# Altium PCB Mobile Tracker Hat.PcbDoc
Units mm, origin at the board's own origin, x right, y up, seen from the top; angles counter-clockwise.
Board outline 75 x 68 mm, 2 copper layers (Top Layer, Bottom Layer), stack 1.569 mm thick; 37 components, 17 nets, 90 pads, 85 vias.
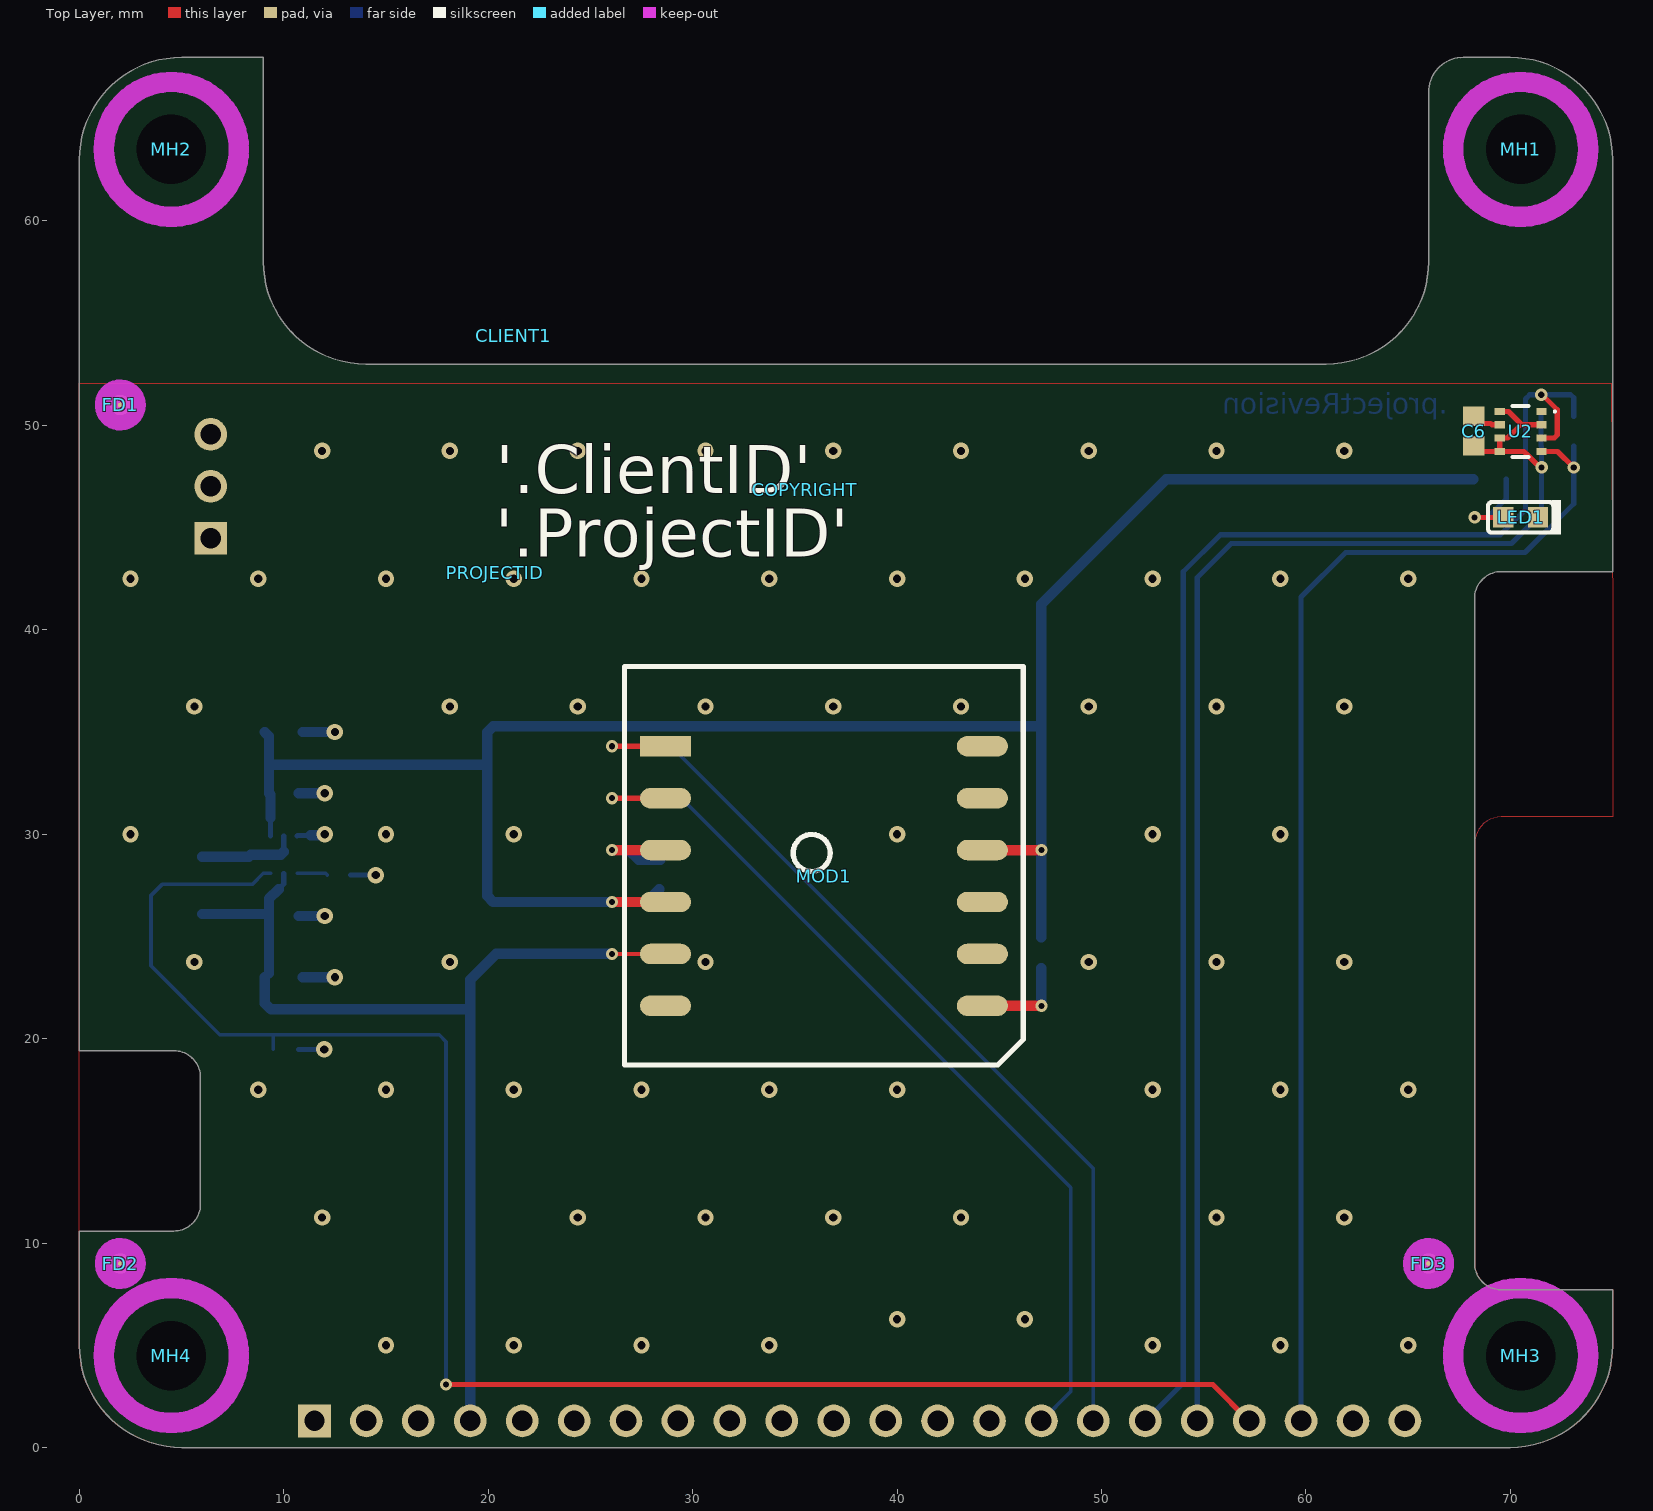
[diagram p0: Top Layer view]
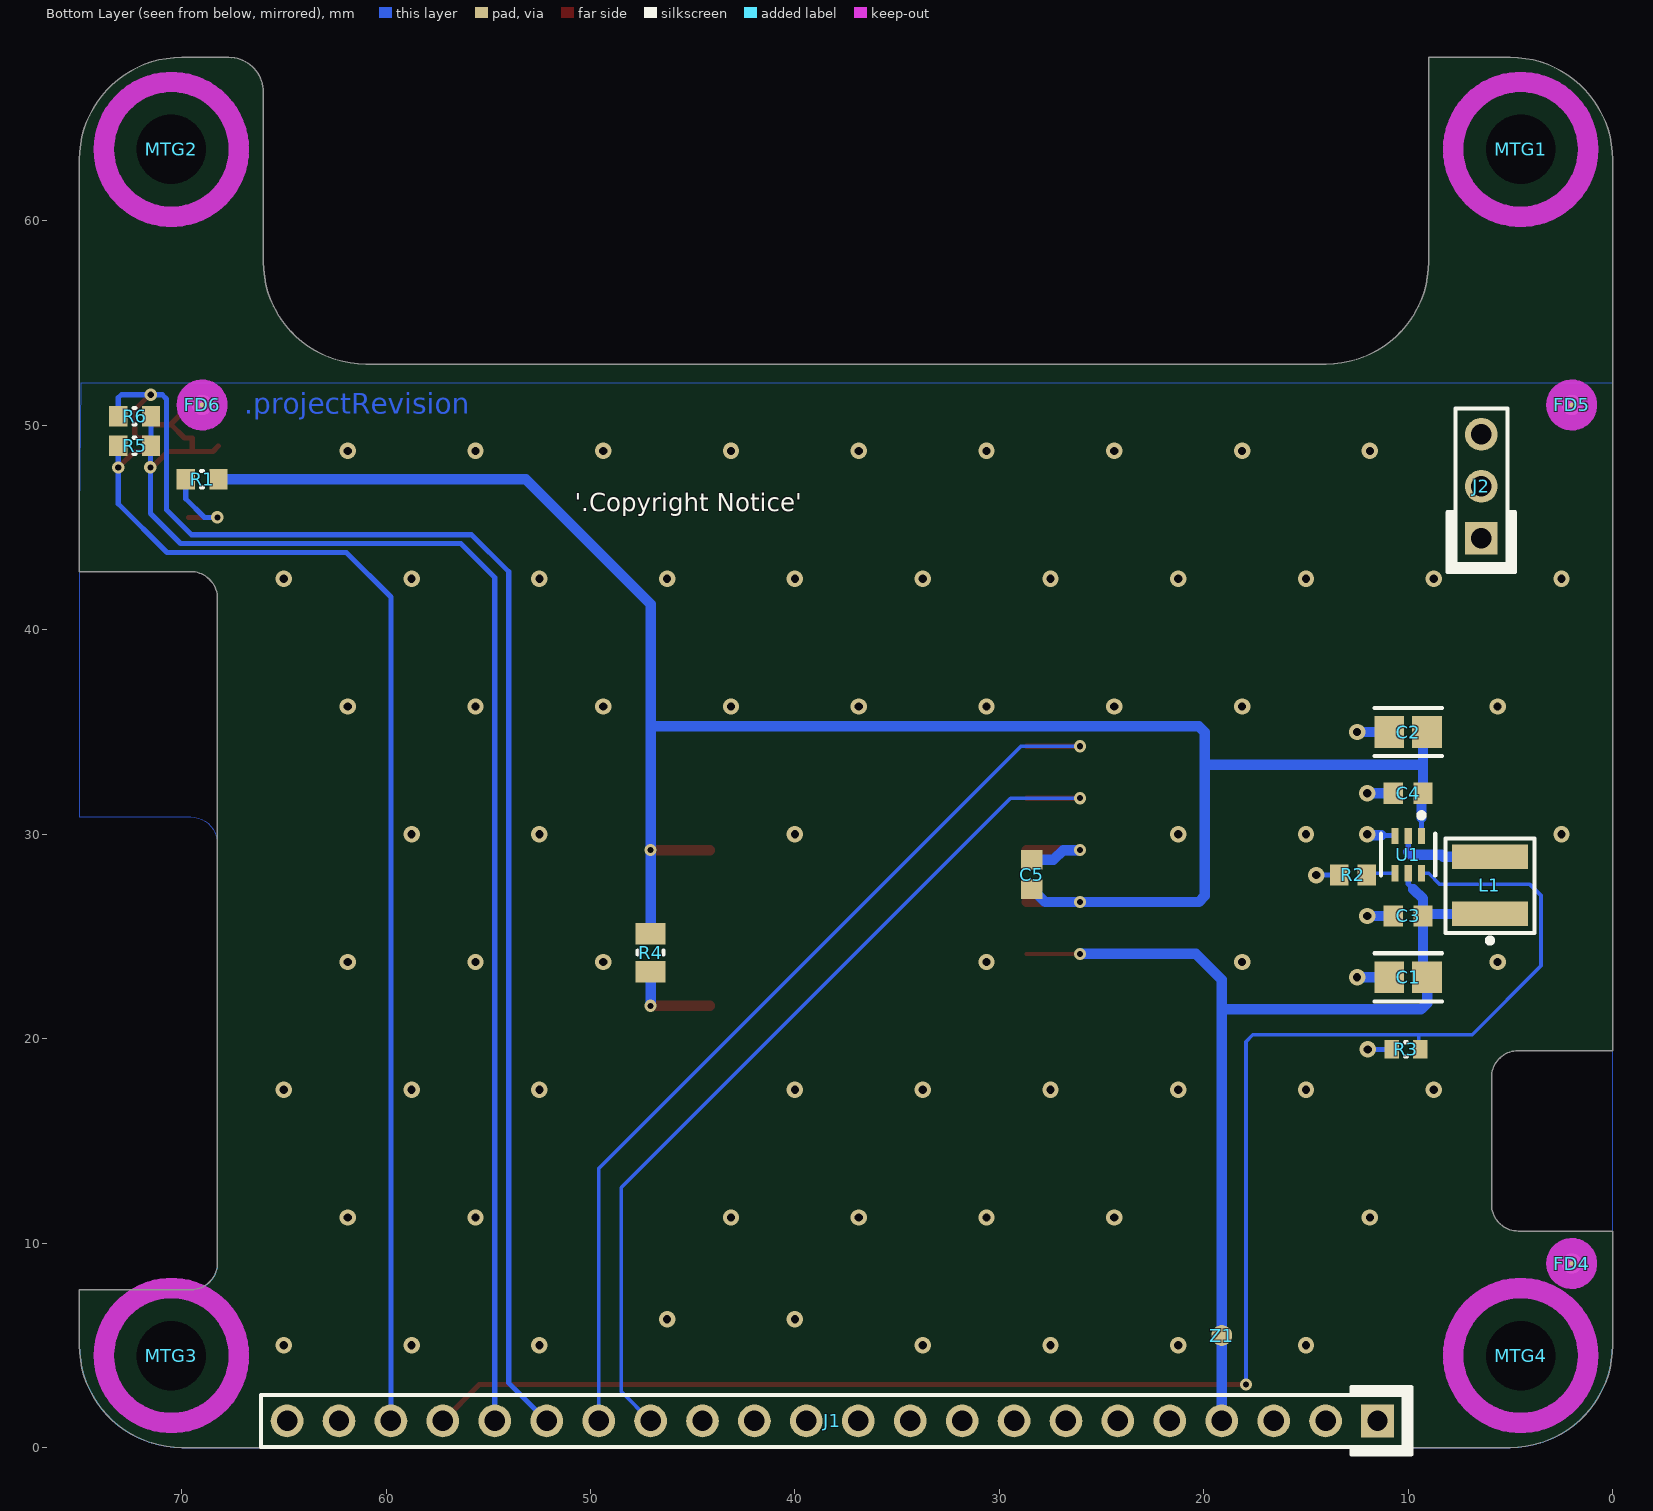
[diagram p1: Bottom Layer view, seen from below]

## Layer stack, top to bottom
Top Solder: solder mask 0.0254, SM-001, Dk 4
Top Layer: signal copper 0.035
Dielectric 1: core 1.4986, Core-043, Dk 4.3
Bottom Layer: signal copper 0.035
Bottom Solder: solder mask 0.0254, SM-001, Dk 4

## Board outline
5,0 cw(c5,5) 0,5 0,10.591 4.62,10.591 ccw(c4.62,11.891) 5.92,11.891 5.92,18.112 ccw(c4.62,18.112) 4.62,19.412 0,19.412 0,63 cw(c5,63) 5,68 9,68 9,58 ccw(c14,58) 14,53 61,53 ccw(c61,58) 66,58 66,66.309 cw(c67.691,66.309) 67.691,68 70,68 cw(c70,63) 75,63 75,42.846 69.55,42.846 ccw(c69.55,41.546) 68.25,41.546 68.25,9.018 ccw(c69.55,9.018) 69.55,7.718 75,7.718 75,5 cw(c70,5) 70,0

## Design rules (kind name [scope] priority, off if disabled: settings)
AcuteAngle [All] p0: scope1count=1 scope1_0_kind=Board scope1_0_value=Board scope2count=1 scope2_0_kind=Board scope2_0_value=Board commentlength=0 minimum=6.00000000000000E+0001
AcuteAngle [All] p1: minimum=6.00000000000000E+0001 checktracksonly=FALSE
AssemblyTestPointUsage [All] p0: scope1count=1 scope1_0_kind=Board scope1_0_value=Board scope2count=1 scope2_0_kind=Board scope2_0_value=Board commentlength=0
AssemblyTestpoint [All] p0: scope1count=1 scope1_0_kind=Board scope1_0_value=Board scope2count=1 scope2_0_kind=Board scope2_0_value=Board commentlength=0
BoardOutlineClearance BoardOutlineClearance_FID [All] p0: scope1count=1 scope1_0_kind=Footprint scope1_0_value=FID_1mm_3mm scope2count=1 scope2_0_kind=Board scope2_0_value=Board commentlength=0 gap=0.635
BoardOutlineClearance BoardOutlineClearance_Notes [All] p0 off: scope1count=1 scope1_0_kind=Board scope1_0_value=Board scope2count=1 scope2_0_kind=Board scope2_0_value=Board commentlength=59 gap=0 // Protel DXP Scope 1 Expression Was: TouchesRoom('Notes')
BoardOutlineClearance [All] p0 off: scope1count=1 scope1_0_kind=Board scope1_0_value=Board scope2count=1 scope2_0_kind=Board scope2_0_value=Board commentlength=55 gap=0.635 // Protel DXP Scope 1 Expression Was: not OnSilkscreen
BoardOutlineClearance BoardOutlineClearance_FID [HasFootprint('FID_1mm_3mm')] p1: gap=0.635 ignorepadtopadclearanceinfootprint=FALSE except(0: Arc-OutlineEdge Arc-CutoutEdge Track-OutlineEdge Track-CutoutEdge SMDPad-OutlineEdge SMDPad-CutoutEdge THPad-OutlineEdge THPad-CutoutEdge Via-OutlineEdge Via-CutoutEdge Fill-OutlineEdge Fill-CutoutEdge Poly-OutlineEdge Poly-CutoutEdge Region-OutlineEdge Region-CutoutEdge Text-OutlineEdge Text-CutoutEdge)
BoardOutlineClearance BoardOutlineClearance_Notes [TouchesRoom('Notes')] p2: gap=0 ignorepadtopadclearanceinfootprint=FALSE
BoardOutlineClearance [not OnSilkscreen] p3: gap=0.635 ignorepadtopadclearanceinfootprint=FALSE except(0.381: THPad-OutlineEdge)
Clearance [All] p0: scope1count=1 scope1_0_kind=Board scope1_0_value=Board scope2count=1 scope2_0_kind=Board scope2_0_value=Board commentlength=0 gap=0.178
Clearance [All] p1: gap=0.178 ignorepadtopadclearanceinfootprint=FALSE
ComponentClearance [All] p0: scope1count=1 scope1_0_kind=Board scope1_0_value=Board scope2count=1 scope2_0_kind=Board scope2_0_value=Board commentlength=0 gap=0.254 collisioncheckmode=3
DiffPairsRouting [All] p0: scope1count=1 scope1_0_kind=Board scope1_0_value=Board scope2count=1 scope2_0_kind=Board scope2_0_value=Board commentlength=0
FabricationTestPointUsage [All] p0: scope1count=1 scope1_0_kind=Board scope1_0_value=Board scope2count=1 scope2_0_kind=Board scope2_0_value=Board commentlength=0 valid=0 allowmultiple=FALSE
FabricationTestpoint [All] p0: scope1count=1 scope1_0_kind=Board scope1_0_value=Board scope2count=1 scope2_0_kind=Board scope2_0_value=Board commentlength=0 side=3 testpointundercomponent=TRUE minsize=1.016 maxsize=2.54 preferedsize=1.524 minholesize=0 maxholesize=1.016 preferedholesize=0.813 testpointgrid=0.025
FanoutControl Fanout_BGA [All] p0 off: scope1count=1 scope1_0_kind=Board scope1_0_value=Board scope2count=1 scope2_0_kind=Board scope2_0_value=Board commentlength=69 // Protel DXP Scope 1 Expression Was: IsBGA   Fanout_BGA (Default Rule)
FanoutControl Fanout_LCC [All] p0 off: scope1count=1 scope1_0_kind=Board scope1_0_value=Board scope2count=1 scope2_0_kind=Board scope2_0_value=Board commentlength=69 // Protel DXP Scope 1 Expression Was: IsLCC   Fanout_LCC (Default Rule)
FanoutControl Fanout_SOIC [All] p0 off: scope1count=1 scope1_0_kind=Board scope1_0_value=Board scope2count=1 scope2_0_kind=Board scope2_0_value=Board commentlength=71 // Protel DXP Scope 1 Expression Was: IsSOIC   Fanout_SOIC (Default Rule)
FanoutControl Fanout_Small [All] p0 off: scope1count=1 scope1_0_kind=Board scope1_0_value=Board scope2count=1 scope2_0_kind=Board scope2_0_value=Board commentlength=84 // Protel DXP Scope 1 Expression Was: (CompPinCount < 5)   Fanout_Small (Default Rule)
FanoutControl Fanout_Default [All] p0: scope1count=1 scope1_0_kind=Board scope1_0_value=Board scope2count=1 scope2_0_kind=Board scope2_0_value=Board commentlength=30 // Fanout_Default (Default Rule)
Height [All] p0: scope1count=1 scope1_0_kind=Board scope1_0_value=Board scope2count=1 scope2_0_kind=Board scope2_0_value=Board commentlength=0
HoleSize [All] p0: scope1count=1 scope1_0_kind=Board scope1_0_value=Board scope2count=1 scope2_0_kind=Board scope2_0_value=Board commentlength=0 absolutevalues=TRUE maxlimit=10 minlimit=0.025 maxpercent=80.000 minpercent=20.000
HoleSize [All] p1: absolutevalues=TRUE maxlimit=10 minlimit=0.025 maxpercent=80.000 minpercent=20.000
HoleToHoleClearance [All] p0: scope1count=1 scope1_0_kind=Board scope1_0_value=Board scope2count=1 scope2_0_kind=Board scope2_0_value=Board commentlength=0
LayerPairs [All] p0: scope1count=1 scope1_0_kind=Board scope1_0_value=Board scope2count=1 scope2_0_kind=Board scope2_0_value=Board commentlength=0 enforce=TRUE
MinimumAnnularRing [All] p0: scope1count=1 scope1_0_kind=Board scope1_0_value=Board scope2count=1 scope2_0_kind=Board scope2_0_value=Board commentlength=0 minimumring=0.15
MinimumAnnularRing [All] p1: minimumring=0.15
MinimumSolderMaskSliver [All] p0: scope1count=1 scope1_0_kind=Board scope1_0_value=Board scope2count=1 scope2_0_kind=Board scope2_0_value=Board commentlength=0
MinimumSolderMaskSliver [All] p1: minsoldermaskwidth=0.102
NetAntennae [All] p0: scope1count=1 scope1_0_kind=Board scope1_0_value=Board scope2count=1 scope2_0_kind=Board scope2_0_value=Board commentlength=0
PasteMaskExpansion [All] p0: scope1count=1 scope1_0_kind=Board scope1_0_value=Board scope2count=1 scope2_0_kind=Board scope2_0_value=Board commentlength=0 expansion=0
PlaneClearance [All] p0: scope1count=1 scope1_0_kind=Board scope1_0_value=Board scope2count=1 scope2_0_kind=Board scope2_0_value=Board commentlength=0 clearance=0.508
PlaneConnect [All] p0: scope1count=1 scope1_0_kind=Board scope1_0_value=Board scope2count=1 scope2_0_kind=Board scope2_0_value=Board commentlength=0 planeconnectstyle=Relief reliefexpansion=0.508 reliefentries=4 reliefconductorwidth=0.254 reliefairgap=0.254
PolygonConnect [All] p0: scope1count=1 scope1_0_kind=Board scope1_0_value=Board scope2count=1 scope2_0_kind=Board scope2_0_value=Board commentlength=0 connectstyle=Relief reliefconductorwidth=0.254 reliefentries=4 polygonreliefangle="90 Angle"
PolygonConnect [All] p1: thpad.connectstyle=Relief thpad.reliefconductorwidth=0.254 thpad.reliefentries=4 thpad.polygonreliefangle="90 Angle" thpad.airgapwidth=0.254 smdpad.connectstyle=Relief smdpad.reliefconductorwidth=0.254 smdpad.reliefentries=4 smdpad.polygonreliefangle="90 Angle" smdpad.airgapwidth=0.254 via.connectstyle=Direct via.reliefconductorwidth=0.254 via.reliefentries=4 via.polygonreliefangle="90 Angle" via.airgapwidth=0.254
RoomDefinition "Cover Sheet" [All] p0: scope1count=1 scope1_0_kind=ComponentClass scope1_0_value="Cover Sheet" scope2count=1 scope2_0_kind=Board scope2_0_value=Board commentlength=0 region_x1=11500000 region_y1=18000000 region_x2=29500000 region_y2=24000000 confinementstyle=ConfineIn
RoomDefinition "Mobile Tracker Hat" [All] p0: scope1count=1 scope1_0_kind=ComponentClass scope1_0_value="Mobile Tracker Hat" scope2count=1 scope2_0_kind=Board scope2_0_value=Board commentlength=0 region_x1=4000000 region_y1=3500000 region_x2=33500000 region_y2=30500000 confinementstyle=ConfineIn
RoomDefinition "Cover Sheet" [InComponentClass('Cover Sheet')] p1: confinementstyle=ConfineIn formatcopy=TRUE lockcomponents=FALSE outline 19.21,35.72 64.93,35.72 64.93,50.96 19.21,50.96
RoomDefinition "Mobile Tracker Hat" [InComponentClass('Mobile Tracker Hat')] p2: confinementstyle=ConfineIn formatcopy=TRUE lockcomponents=FALSE outline 0.16,-1.11 75.09,-1.11 75.09,67.47 0.16,67.47
RoutingCorners [All] p0: scope1count=1 scope1_0_kind=Board scope1_0_value=Board scope2count=1 scope2_0_kind=Board scope2_0_value=Board commentlength=0 cornerstyle=45-Degree minsetback=2.54 maxsetback=2.54
RoutingLayers [All] p0: scope1count=1 scope1_0_kind=Board scope1_0_value=Board scope2count=1 scope2_0_kind=Board scope2_0_value=Board commentlength=0 top layer=Automatic bottom layer=Automatic
RoutingPriority [All] p0: scope1count=1 scope1_0_kind=Board scope1_0_value=Board scope2count=1 scope2_0_kind=Board scope2_0_value=Board commentlength=0
RoutingTopology [All] p0: scope1count=1 scope1_0_kind=Board scope1_0_value=Board scope2count=1 scope2_0_kind=Board scope2_0_value=Board commentlength=0 topology=Shortest
RoutingVias [All] p0: scope1count=1 scope1_0_kind=Board scope1_0_value=Board scope2count=1 scope2_0_kind=Board scope2_0_value=Board commentlength=0 holewidth=0.711 width=1.27 viastyle="Through Hole" minholewidth=0.711 minwidth=1.27 maxholewidth=0.711 maxwidth=1.27
RoutingVias [All] p1: holewidth=0.711 width=1.27 viastyle="Through Hole" minholewidth=0.711 minwidth=1.27 maxholewidth=0.711 maxwidth=1.27 useviatemplates=TRUE viatemplateguid#1={E0368EBB-4CE6-4FE2-A2E7-85C7EB241FD8} viatemplateguid#2={4DA122B4-FB4A-4B3C-813E-98F42B4E5CB5} viatemplatename#1=v60h30 viatemplatename#2=v80h40
SMDEntry [All] p0 off: scope1count=1 scope1_0_kind=Board scope1_0_value=Board scope2count=1 scope2_0_kind=Board scope2_0_value=Board commentlength=0
SMDEntry [All] p1 off: side=TRUE corner=TRUE anyangle=FALSE
SMDNeckDown [All] p0 off: scope1count=1 scope1_0_kind=Board scope1_0_value=Board scope2count=1 scope2_0_kind=Board scope2_0_value=Board commentlength=0 percent=80.000
SMDNeckDown [All] p1 off: percent=80.000
SMDToCorner [All] p0: scope1count=1 scope1_0_kind=Board scope1_0_value=Board scope2count=1 scope2_0_kind=Board scope2_0_value=Board commentlength=0 distance=50000
SMDToCorner [All] p1: distance=50000
SMDToPlane [All] p0: scope1count=1 scope1_0_kind=Board scope1_0_value=Board scope2count=1 scope2_0_kind=Board scope2_0_value=Board commentlength=0 distance=500000
SMDToPlane [All] p1: distance=500000
ShortCircuit [All] p0: scope1count=1 scope1_0_kind=Board scope1_0_value=Board scope2count=1 scope2_0_kind=Board scope2_0_value=Board commentlength=0 allowed=FALSE
SilkToBoardRegionClearance [All] p0: scope1count=1 scope1_0_kind=Board scope1_0_value=Board scope2count=1 scope2_0_kind=Board scope2_0_value=Board commentlength=0
SilkToSilkClearance [All] p0: scope1count=1 scope1_0_kind=Board scope1_0_value=Board scope2count=1 scope2_0_kind=Board scope2_0_value=Board commentlength=0
SilkToSilkClearance [All] p1: silktosilkclearance=0.102
SilkToSolderMaskClearance SilkToSolderMaskNoTextOverVias [All] p0 off: scope1count=1 scope1_0_kind=Board scope1_0_value=Board scope2count=1 scope2_0_kind=Board scope2_0_value=Board commentlength=121 // Protel DXP Scope 2 Expression Was: IsText and IsDesignator   Avoid placing designator and other text directly over a via
SilkToSolderMaskClearance [All] p0 off: scope1count=1 scope1_0_kind=Board scope1_0_value=Board scope2count=1 scope2_0_kind=Board scope2_0_value=Board commentlength=105 // Protel DXP Scope 1 Expression Was: IsPad   Avoid silkscreen on pad that can lead to solderability issues
SilkToSolderMaskClearance SilkToSolderMaskNoTextOverVias [IsVia or IsPad vs IsText and IsDesignator] p1: minsilkscreentomaskgap=0.025 clearancetoexposedcopper=TRUE // Avoid placing designator and other text directly over a via
SilkToSolderMaskClearance [IsPad] p2: minsilkscreentomaskgap=0.102 clearancetoexposedcopper=TRUE // Avoid silkscreen on pad that can lead to solderability issues
SolderMaskExpansion [All] p0: scope1count=1 scope1_0_kind=Board scope1_0_value=Board scope2count=1 scope2_0_kind=Board scope2_0_value=Board commentlength=0 expansion=0.051
SolderMaskExpansion [All] p1: expansion=0.051 istentingtop=FALSE
UnRoutedNet [All] p0: scope1count=1 scope1_0_kind=Board scope1_0_value=Board scope2count=1 scope2_0_kind=Board scope2_0_value=Board commentlength=0
UnRoutedNet [All] p1: checkbadconnections=TRUE
UnpouredPolygon [All] p0: scope1count=1 scope1_0_kind=Board scope1_0_value=Board scope2count=1 scope2_0_kind=Board scope2_0_value=Board commentlength=0
Width Width_Power [All] p0: scope1count=1 scope1_0_kind=NetClass scope1_0_value=Power scope2count=1 scope2_0_kind=Board scope2_0_value=Board commentlength=0 maxlimit=1.27 minlimit=0.254 preferedwidth=0.762
Width [All] p0: scope1count=1 scope1_0_kind=Board scope1_0_value=Board scope2count=1 scope2_0_kind=Board scope2_0_value=Board commentlength=0 maxlimit=0.508 minlimit=0.178 preferedwidth=0.254
Width Width_Power [InNetClass('Power')] p1: maxlimit=1.27 minlimit=0.254 preferedwidth=0.762
Width [All] p2: maxlimit=0.508 minlimit=0.178 preferedwidth=0.254 checkconnectedcopper=TRUE
25 further rules are at their usual default settings.

## Classes and differential pairs
component class "Cover Sheet": CLIENT1 COPYRIGHT PROJECTID PWB
component class "Mobile Tracker Hat": C1 C2 C3 C4 C5 C6 FD1 FD2 FD3 FD4 FD5 FD6 J1 J2 L1 LED1 MH1 MH2 MH3 MH4 MOD1 MTG1 MTG2 MTG3 MTG4 R1 R2 R3 R4 R5 R6 U1 U2 Z1

## Components (designator, comment, footprint, x,y, rotation, side; value= is the part's Value field where it differs from the comment)
C1 "CL21A226MQQNNNE" FP-CL21-IPC_A 10,23 r0 bottom
C2 "CL21A226MQQNNNE" FP-CL21-IPC_A 10,35 r0 bottom
C3 "CL10B104KB8NNNC" SAMS-C0603-2_M 10,26 r180 bottom
C4 "CL10B104KB8NNNC" SAMS-C0603-2_M 10,32 r180 bottom
C5 "CL10B104KB8NNNC" SAMS-C0603-2_M 28.422,28.026 r270 bottom
C6 "CL10B104KB8NNNC" SAMS-C0603-2_M 68.207,49.717 r270 top
CLIENT1 "Client" CLIENT_MARK 21.25,54.378 r0 top
COPYRIGHT "Copyright Notice" COPYRIGHT_MARK 35.5,46.861 r0 top
FD1 "Global Fiducial" FID_1mm_3mm 2,51 r0 top
FD2 "Global Fiducial" FID_1mm_3mm 2,9 r0 top
FD3 "Global Fiducial" FID_1mm_3mm 66,9 r0 top
FD4 "Global Fiducial" FID_1mm_3mm 2,9 r0 bottom
FD5 "Global Fiducial" FID_1mm_3mm 2,51 r0 bottom
FD6 "Global Fiducial" FID_1mm_3mm 69,51 r0 bottom
J1 "Notecarrier Ax 22pos Connector" HDR-NC-AX-22_4UCON 11.5,1.3 r0 bottom
J2 "Notecarrier Ax 3pos Connector" HDR-NC-AX-3_4UCON 6.42,44.48 r90 bottom
L1 "NRS4018T2R2MDGJ" COIL_4040x18 6,27.5 r90 bottom
LED1 "E6C0603VGAC1UDA" E6C0603VGAC1UDA 70.5,45.5 r180 top
MH1 "M3" HOLE_3MM 70.5,63.5 r180 top
MH2 "M3" HOLE_3MM 4.5,63.5 r180 top
MH3 "M3" HOLE_3MM 70.5,4.5 r180 top
MH4 "M3" HOLE_3MM 4.5,4.5 r180 top
MOD1 "L86-M33" "Quectel L86" 36.422,28.454 r180 top
MTG1 "Spacer M3-8mm (OD=6.4mm)" "SPACER_M3_8MM (4.75 OD)" 4.5,63.5 r180 bottom
MTG2 "Spacer M3-8mm (OD=6.4mm)" "SPACER_M3_8MM (4.75 OD)" 70.5,63.5 r180 bottom
MTG3 "Spacer M3-8mm (OD=6.4mm)" "SPACER_M3_8MM (4.75 OD)" 70.5,4.5 r180 bottom
MTG4 "Spacer M3-8mm (OD=6.4mm)" "SPACER_M3_8MM (4.75 OD)" 4.5,4.5 r180 bottom
PROJECTID "Project ID" PROJECTID_MARK 20.331,42.799 r0 top
R1 "10K 5% 0603(1608)" RESC0603(1608)_N 68.996,47.361 r180 bottom
R2 "CRCW060334K0FKEA" RESC1609X50X30ML10T20 12.7,28.006 r0 bottom
R3 "200K 1% 0603(1608)" RESC0603(1608)_L 10.108,19.474 r180 bottom
R4 "CRCW080510K0FKEC" RESC2013X50X30NL20T20 47.06,24.208 r90 bottom
R5 "10K 5% 0603(1608)" RESC0603(1608)_N 72.296,48.992 r180 bottom
R6 "10K 5% 0603(1608)" RESC0603(1608)_N 72.296,50.442 r180 bottom
U1 "MAX17225ELT+T" FP-L622-1C-MFG 10,29 r270 bottom
U2 "BME280" BOSC-BME280-8_V 70.5,49.703 r0 top
Z1 "Test Point Vbackup" testp_40pad 19.12,5.479 r180 bottom

## Footprints (in the part's own frame and the unit in brackets; to place one, negate y for a bottom-side part, rotate by r counter-clockwise, add the part's x,y. Pads: shape width x height; smd on the part's side, far side on the other; paste and mask are expansions set on the pad)
BOSC-BME280-8_V [mm] "SMD, 8-Leads, Body 2.5x2.5mm, Pitch 0.65mm"
  rect 0.5x0.35 smd: 1(1.025,0.975) 2(1.025,0.325) 3(1.025,-0.325) 4(1.025,-0.975) 5(-1.025,-0.975) 6(-1.025,-0.325) 7(-1.025,0.325) 8(-1.025,0.975)
  silkscreen extent -0.39,-1.25 1.73,1.25
CLIENT_MARK [mm] "Client Marking"
COIL_4040x18 [mm] "Inductor, 2-Leads, 4.0 x 4.0 mm, 1.8 mm high"
  rect 1.2x3.7 smd: 1(-1.4,0) 2(1.4,0)
  silkscreen extent -2.82,-2.17 2.3,2.17
COPYRIGHT_MARK [mm] "Copyright Notice Marking"
E6C0603VGAC1UDA [mm] "SMT LED, 2-Leads, Body 1.6x0.8mm (0603-Size)"
  rect 1x1 smd paste+0 mask+0: 1(0.85,0) 2(-0.85,0)
  silkscreen extent -1.97,-0.85 1.6,0.85
FID_1mm_3mm [mm] "Fiducial, 1mm copper round, 3mm solder mask round, with keepout"
  round 1 smd paste-1 mask+0: FID(0,0)
  Top Layer keep-out circle w0.5: c0,0 r1
  Top Layer keep-out circle w1: c0,0 r0.62
FP-CL21-IPC_A [mm]
  rect 1.455x1.556 smd paste+0 mask+0: 1(-0.926,0) 2(0.926,0)
  silkscreen extent -1.65,-1.18 1.65,1.18
FP-L622-1C-MFG [mm]
  rect 0.8x0.35 smd paste+0 mask+0: 1(-0.915,0.65) 2(-0.915,0) 3(-0.915,-0.65) 4(0.915,-0.65) 5(0.915,0) 6(0.915,0.65)
  silkscreen extent -2.05,-1.33 1.02,1.33
HDR-NC-AX-3_4UCON [mm] "Header, 3pos, to Notecarrier AX, 2.5 mm body"
  rect 1.6x1.6 hole 1: 1(0,0)
  round 1.6 hole 1: 2(2.54,0) 3(5.08,0)
  silkscreen extent -1.65,-1.65 6.35,1.65
HDR-NC-AX-22_4UCON [mm] "Header, 22 pos, to Notecarrier AX, 2.5mm body"
  rect 1.6x1.6 hole 1: 1(0,0)
  round 1.6 hole 1: 2(2.54,0) 3(5.08,0) 4(7.62,0) 5(10.16,0) 6(12.7,0) 7(15.24,0) 8(17.78,0) 9(20.32,0) 10(22.86,0) 11(25.4,0) 12(27.94,0) 13(30.48,0) 14(33.02,0) 15(35.56,0) 16(38.1,0) 17(40.64,0) 18(43.18,0) 19(45.72,0) 20(48.26,0) 21(50.8,0) 22(53.34,0)
  silkscreen extent -1.65,-1.65 54.61,1.65
HOLE_3MM [mm] "Bare Hole M3 - Normal Fit (3.4 mm)"
  round 0 hole 3.4 unplated: MH(0,0)
  Keep-Out Layer circle w0.1: c0,0 r3.04
PROJECTID_MARK [mm] "Project ID Marking"
"Quectel L86" [mm] "Quectel L86 Module"
  rect 2.5x1 smd: 1(7.75,-5.85)
  oval 2.5x1 smd: 2(7.75,-3.31) 3(7.75,-0.77) 4(7.75,1.77) 5(7.75,4.31) 6(7.75,6.85) 7(-7.75,6.85) 8(-7.75,4.31) 9(-7.75,1.77) 10(-7.75,-0.77) 11(-7.75,-3.31) 12(-7.75,-5.85)
  silkscreen extent -9.75,-9.75 9.75,9.75
RESC0603(1608)_L [mm] "Chip Resistor, Body 1.6x0.8mm, IPC High Density"
  rect 0.7x0.9 smd: 1(-0.7,0) 2(0.7,0)
  silkscreen extent -0.05,-0.35 0.05,0.35
RESC0603(1608)_N [mm] "Chip Resistor, Body 1.6x0.8mm, IPC Medium Density"
  rect 0.9x1 smd: 1(-0.8,0) 2(0.8,0)
  silkscreen extent -0.05,-0.4 0.05,0.4
RESC1609X50X30ML10T20 [mm] "Chip Resistor, 2-Leads, Body 1.55x0.85mm, IPC Low Density"
  rect 0.9x1.05 smd: 1(-0.675,0) 2(0.675,0)
RESC2013X50X30NL20T20 [mm] "Chip Resistor, 2-Leads, Body 2.00x1.25mm, IPC Medium Density"
  rect 1.05x1.45 smd: 1(-0.925,0) 2(0.925,0)
  silkscreen extent -0.1,-0.63 0.1,0.63
SAMS-C0603-2_M [mm] "Chip Capacitor, 2-Leads, Body 1.70x0.90mm, IPC Low Density"
  rect 0.95x1.05 smd: 1(-0.725,0) 2(0.725,0)
"SPACER_M3_8MM (4.75 OD)" [mm] "Spacer, M3 non-threaded. L=8mm. OD=4.75mm"
testp_40pad [mil] "Test Point, 40 mil pad. One side"
  round 40 smd paste-40: 1(0,0)

## Part data
C1 C2: library part CMP-13271-000185-1, "CL21 Series 0805 22uF 6.3V ±20% Tolerance X5R Multilayer Ceramic Chip Capacitor"
C3 C4 C5 C6: library part CMP-2000-05332-1, "Multi-layer Ceramic Capacitor, -55 to 125 degC, 2-Pin SMD (0603), RoHS, Tape and Reel"
CLIENT1: library part CLIENTID_MARK, "Client ID"
COPYRIGHT: library part COPYRIGHT_MARK
FD1 FD2 FD3 FD4 FD5 FD6: library part Fiducial_Global, "Fiducial, Global"
J1: library part HDR-NC-AX-22_4UCON, "Header, 22 pos. For connection to Notecarrier Ax."
J2: library part HDR-NC-AX-3_4UCON, "Header, 3 pos. For connection to Notecarrier Ax."
L1: library part TAIYO_NRS4018T2R2MDGJ, "2.2uH, 2.20A, SMD (4.0 x 4.0mm, 1.8 mm high)"
LED1: "Green 520nm 800mcd @ 20mA, 1.6 x 0.8 mm"
MH1 MH2 MH3 MH4: library part "Bare Hole M3", "Bare Hole, M3"
MOD1: "Global Navigation Satellite System Module with Patch Antenna. Quectel L86-M33"
MTG1 MTG2 MTG3 MTG4: library part "SPACER_M3_8MM (6.40 OD)", "Spacer, non-threaded. M3 ID, 6.4mm OD.  L=8mm"
PROJECTID: library part PROJECTID_MARK
R1 R5 R6: library part CMP-1012-00098-1, "10K 0.1W 5% 0603 (1608 Metric)  SMD"
R2: library part CMP-00015-2, "Res SMD 0603 34K Ohm 1% 1/10W"
R3: library part CMP-00002-1, "200K 0.1W 1% 0603 (1608 Metric)  SMD"
R4: library part CMP-00014-2, "Res SMD 0805 10K Ohm 1% 1/8W"
U1: library part CMP-00003-2, "Switching Voltage Regulators 0.9V to 5V, 500mA Input Current Limit Ultra Low Pow"
U2: library part CMP-2000-05073-1, "Combined Humidity and Pressure Sensor, 1.71 to 3.6 V, -40 to 85 degC, 8-Pin SMD, RoHS, Tape and Reel"
Z1: library part test_pt, "Test point"

## Via types
v1: diameter 0.8, hole 0.4, Top Layer to Bottom Layer, tented both sides, 66 vias
v2: diameter 0.6, hole 0.3, Top Layer to Bottom Layer, 12 vias
v3: diameter 0.8, hole 0.4, Top Layer to Bottom Layer, 7 vias

## Nets (pads, with @x,y where several pads share a name; then routed paths per layer and width w, separated by ;. In a path a pad name is that pad's centre, name@x,y a point inside that pad or via, vN(x,y) a via of type N, cw(c..) or ccw(c..) an arc to the next point about the centre after c; other vN are vias at no path point)
3V8: C2.1 C4.2 C5.2 MOD1.4 MOD1.10 R1.2 R4.2 U1.1 | length 105.4
  Top Layer w0.508: v2(26.053,26.684) MOD1.4 ; MOD1.10 v2(47.06,29.224)
  Bottom Layer w0.254: U1.1 9.35,30.8
  Bottom Layer w0.508: C2.1 9.275,34.799 9.275,33.4 ; 9.35,30.8 9.35,31.925 C4.2 9.275,33.4 ; C5.2@28.372,27.301 27.755,26.684 v2(26.053,26.684) 20.243,26.684 19.945,26.982 19.945,33.332 ; R4.2@47.06,24.958 v2(47.06,29.224) 47.06,35.282 ; R1.2 53.163,47.361 47.06,41.258 47.06,35.282 ; 9.275,33.4 19.877,33.4 19.945,33.332 ; 19.945,33.332 19.945,34.984 20.243,35.282 47.06,35.282
AUX_RX: J1.15 MOD1.2 | length 45
  Top Layer w0.254: v2(26.053,31.764) MOD1.2
  Bottom Layer w0.178: v2(26.053,31.764) 29.45,31.764 48.5,12.714 48.5,2.74 J1.15
AUX_TX: J1.16 MOD1.1 | length 47.1
  Top Layer w0.254: v2(26.053,34.304) MOD1.1
  Bottom Layer w0.178: v2(26.053,34.304) 28.942,34.304 49.6,13.646 J1.16
BME_EN: C6.2 J1.18 R5.2 R6.2 U2.2 U2.5 U2.6 U2.8 | length 72.2
  Top Layer w0.254: C6.2 68.471,48.728 U2.5 ; U2.8 69.913,50.678 70.5,50.091 70.532,50.059 ; U2.2 70.563,50.028 70.532,50.059 ; v2(71.528,47.945) 71.452,47.945 70.669,48.728 U2.5 ; U2.5 U2.6 69.852,49.378 70.532,50.059
  Bottom Layer w0.254: J1.18 54.68,42.555 56.342,44.217 70.052,44.217 71.528,45.693 v2@71.528,47.766 ; R6.2 R5.2 71.528,48.961 v2(71.528,47.945) v2@71.617,47.856
BME_SCL: J1.20 R5.1 U2.4 | length 60.2
  Top Layer w0.254: U2.4 72.311,48.728 v2(73.096,47.943)
  Bottom Layer w0.254: J1.20 59.76,41.597 61.949,43.786 70.718,43.786 73.096,46.163 v2(73.096,47.943) R5.1
BME_SDA: J1.17 R6.1 U2.3 | length 72.3
  Top Layer w0.254: v2(71.511,51.5) 71.559,51.5 72.296,50.763 72.296,49.527 72.147,49.378 U2.3
  Bottom Layer w0.254: J1.17 54,3.16 54,42.837 55.813,44.649 69.522,44.649 70.741,45.868 70.741,51.296 70.945,51.5 v2(71.511,51.5) 72.947,51.5 73.096,51.351 R6.1
GND: C1.2 C2.2 C3.1 C4.1 C5.1 C6.1 J1.7 J2.1 J2.2 J2.3 LED1.2 MOD1.3 MOD1.12 R2.2 R3.1 U1.3 U2.1 U2.7 | length 16.2
  Top Layer w0.254: C6.1 68.555,50.094 69.032,50.094 69.098,50.028 U2.7
  Top Layer w0.508: v2(26.053,29.224) MOD1.3
  Bottom Layer w0.254: U1.3 10.679,29.944 11.325,29.944 ; R3.1@10.733,19.474 v3(11.974,19.474) ; R2.2@13.275,28.006 14.494,28.006 v3(14.5,28)
  Bottom Layer w0.508: C3.1 v3(12,26) ; C4.1 v3(12,32) ; C1.2 v3(12.5,23) ; C2.2 v3(12.5,35) ; 11.325,29.944 11.944,29.944 v3(12,30) ; v2(26.053,29.224) 26.878,29.224 27.351,28.751 C5.1
  other v1: 15,5 21.25,5 27.5,5 33.75,5 52.5,5 58.75,5 65,5 40,6.27 46.25,6.27 11.875,11.25 24.375,11.25 30.625,11.25 36.875,11.25 43.125,11.25 55.625,11.25 61.875,11.25 8.75,17.5 15,17.5 21.25,17.5 27.5,17.5 33.75,17.5 40,17.5 52.5,17.5 58.75,17.5 65,17.5 5.625,23.75 18.125,23.75 30.625,23.75 49.375,23.75 55.625,23.75 61.875,23.75 2.5,30 15,30 21.25,30 40,30 52.5,30 58.75,30 5.625,36.25 18.125,36.25 24.375,36.25 30.625,36.25 36.875,36.25 43.125,36.25 49.375,36.25 55.625,36.25 61.875,36.25 2.5,42.5 8.75,42.5 15,42.5 21.25,42.5 27.5,42.5 33.75,42.5 40,42.5 46.25,42.5 52.5,42.5 58.75,42.5 65,42.5 11.875,48.75 18.125,48.75 24.375,48.75 30.625,48.75 36.875,48.75 43.125,48.75 49.375,48.75 55.625,48.75 61.875,48.75
GPS_EN: J1.19 R3.2 U1.6 | length 83.2
  Top Layer w0.254: v2(17.936,3.083) 55.437,3.083 J1.19
  Bottom Layer w0.178: U1.6 9,28.085 8.46,27.545 4.045,27.545 3.5,27 3.5,23.559 6.869,20.191 9.508,20.191 ; R3.2@9.483,19.474 9.483,20.166 9.508,20.191 ; v2(17.936,3.083) 17.936,19.851 17.597,20.191 9.508,20.191
NetL1_2: L1.2 U1.2 | length 4.9
  Bottom Layer w0.254: 10,29.149 U1.2
  Bottom Layer w0.508: L1.2 8.28,28.9 8.38,29 9.851,29 10,29.149
NetLED1_1: LED1.1 R1.1 | length 4.3
  Top Layer w0.254: v2(68.25,45.5) LED1.1
  Bottom Layer w0.254: v2(68.25,45.5) 68.887,45.5 69.796,46.408 R1.1
NetMOD1_7: MOD1.7 R4.1 | length 4.7
  Top Layer w0.508: MOD1.7 v2(47.06,21.604)
  Bottom Layer w0.508: v2(47.06,21.604) R4.1@47.06,23.458
NetR2_1: R2.1 U1.4 | length 1.5
  Bottom Layer w0.178: U1.4 12.046,28.085 R2.1@12.125,28.006
RX: J1.21
SCL: J1.11
SDA: J1.12
TX: J1.22
VIO: C1.1 C3.2 J1.4 L1.1 MOD1.5 U1.5 Z1.1 | length 51.9
  Top Layer w0.178: v2(26.053,24.144) MOD1.5
  Bottom Layer w0.254: C1.1 C1.1@9.275,23.201 ; 9.745,27.305 10,27.561 U1.5
  Bottom Layer w0.508: L1.1 9.175,26.1 C3.2 ; C1.1 9.074,21.738 9.372,21.44 19.12,21.44 ; C1.1@9.275,23.201 C3.2 ; 9.745,27.305 9.275,26.836 C3.2 ; J1.4 Z1.1 19.12,21.44 ; v2(26.053,24.144) 20.384,24.144 19.12,22.88 19.12,21.44
pads on no net: FD1.FID FD2.FID FD3.FID FD4.FID FD5.FID FD6.FID J1.1 J1.2 J1.3 J1.5 J1.6 J1.8 J1.9 J1.10 J1.13 J1.14 MH1.MH MH2.MH MH3.MH MH4.MH MOD1.6 MOD1.8 MOD1.9 MOD1.11

## Polygon pours and split planes (outlines as drawn)
GND on Top Layer "GND_L01_P-001" (solid, pour order 0): 0,52.07 74.93,52.07 75,40.64 75,30.846 69.55,30.846 ccw(c69.55,29.546) 68.25,29.546 68.25,9.018 ccw(c69.55,9.018) 69.55,7.718 75,7.718 75,5 cw(c70,5) 70,0 5,0 cw(c5,5) 0,5
GND on Bottom Layer "GND_L02_P-002" (solid, pour order 5): 0,52.07 74.93,52.07 75,45.72 75,30.846 69.55,30.846 ccw(c69.55,29.546) 68.25,29.546 68.25,9.018 ccw(c69.55,9.018) 69.55,7.718 75,7.718 75,5 cw(c70,5) 70,0 5,0 cw(c5,5) 0,5

## Keep-outs
Keep-Out Layer:
  circle w1: c4.5,63.5 r3.3
  circle w1: c4.5,4.5 r3.3
  circle w1: c70.5,4.5 r3.3
  circle w1: c70.5,63.5 r3.3

## Other copper
Bottom Layer:
  text ".projectRevision" at 66.945,50.569 h1

## Silkscreen, mask and mechanical layers (free items; w line width, h text height)
Board Outline:
  the board outline again, w0.254
LayerID:
  text "'.Printout_Name'" at 203.12,-1.754 h2.54
  text "'.Plot_File_Name'" at 203.12,-4.294 h2.54
Fab Notes:
  drawing of 238 lines, arcs and shapes, not listed
  text "Layer" at 175.752,132.65 h1.2
  text "Name" at 182.617,132.65 h1.2
  text "Material" at 203.478,132.65 h1.2
  text "Thickness" at 214.205,132.65 h1.2
  text "Constant" at 224.446,132.65 h1.2
  text "Gerber" at 234.202,132.65 h1.2
  text "Board Layer Stack" at 241.884,132.65 h1.2
  text "Top Overlay" at 182.617,130.25 h1.2
  text "GTO" at 234.202,130.25 h1.2
  text "Top Solder" at 182.617,127.85 h1.2
  text "SM-001" at 203.478,127.85 h1.2
  text "0.025mm" at 214.205,127.85 h1.2
  text "4" at 224.446,127.85 h1.2
  text "GTS" at 234.202,127.85 h1.2
  text "Top Surface Finish" at 182.617,125.45 h1.2
  text "PbSn" at 203.478,125.45 h1.2
  text "0.020mm" at 214.205,125.45 h1.2
  text "1" at 175.752,123.05 h1.2
  text "Top Layer" at 182.617,123.05 h1.2
  text "CF-004" at 203.478,123.05 h1.2
  text "0.035mm" at 214.205,123.05 h1.2
  text "GTL" at 234.202,123.05 h1.2
  text "Dielectric 1" at 182.617,120.65 h1.2
  text "Core-043" at 203.478,120.65 h1.2
  text "1.499mm" at 214.205,120.65 h1.2
  text "4.3" at 224.446,120.65 h1.2
  text "2" at 175.752,118.25 h1.2
  text "Bottom Layer" at 182.617,118.25 h1.2
  text "CF-004" at 203.478,118.25 h1.2
  text "0.035mm" at 214.205,118.25 h1.2
  text "GBL" at 234.202,118.25 h1.2
  text "Bottom Surface Finish" at 182.617,115.85 h1.2
  text "PbSn" at 203.478,115.85 h1.2
  text "0.020mm" at 214.205,115.85 h1.2
  text "Bottom Solder" at 182.617,113.45 h1.2
  text "SM-001" at 203.478,113.45 h1.2
  text "0.025mm" at 214.205,113.45 h1.2
  text "4" at 224.446,113.45 h1.2
  text "GBS" at 234.202,113.45 h1.2
  text "Bottom Overlay" at 182.617,111.05 h1.2
  text "GBO" at 234.202,111.05 h1.2
  text "Total board thickness:" at 175.752,108.65 h1.2
  text "1.659mm" at 214.205,108.65 h1.2
  text "Client Name: '.ClientID'" at 202.5,97.5 h2.42
  text "Project Name: '.ProjectID'" at 202.5,95 h2.42
  text "File: '.Pcb_File_Name_No_Path'" at 202.5,90 h2.42
  text "Rev: '.ProjectRevision'" at 202.5,87.5 h2.42
  text "NOTES:" at 202.5,82.5 h2.42
  text "UNLESS OTHERWISE SPECIFIED:" at 202.5,80 h2.42
  text "1. Board Dimension: 75.00 mm x 68.00 mm" at 202.5,77.5 h2.42
  text "2. Total Thickness: 1.6 mm +/- 10%" at 202.5,75 h2.42
  text "3. Board Material: FR-4, Tg130+" at 202.5,72.5 h2.42
  text "4. Copper Layers: 2, Weight: 1 oz" at 202.5,70 h2.42
  text "5. Soldermask Layers: Both, Color: Green (LPI preferred)" at 202.5,67.5 h2.42
  text "6. Legend Layers: Both, Color: White. (LPI preferred)" at 202.5,65 h2.42
  text "7. Finish: ENIG" at 202.5,62.5 h2.42
  text "8. Fabricate PCB According to IPC-6012 Class 2" at 202.5,60 h2.42
  text "9. 1.5 mm (0.06\") maximum radius on any inside corner." at 202.5,57.5 h2.42
  text "SPECIAL REQUIREMENTS:" at 202.5,52.5 h2.42
  text "VENDOR NOTES:" at 202.5,45 h2.42
  text "10. Route board shape and any cut outs per Board Outline layer." at 202.5,42.5 h2.42
  text "11. Place Manufacturer Mark and Date Code on bottom" at 202.5,40 h2.42
  text "12. Boards must pass visual inspection per IPC-A-600 Class 2" at 202.5,37.5 h2.42
  text "Engineering Contact: joseph@toybuilderlabs.com" at 202.5,30 h2.42
Drawing Sheet:
  lines w0.1: -10,-10 -10,205.9 269.4,205.9 269.4,-10 -10,-10
  text "'.VersionControl_RevNumber'" at 256,-8.9 h1.4
Scratch Data:
  lines w0.508: 0,22.474 23.122,22.474 23.122,33.483 23.122,37.971 0,37.971 ; 0,25.474 0,40.971
Drill Drawing:
  circle w0.15: c-4.408,189.417 r0.667
  lines w0.15: -5.075,192.083 -4.742,192.083 -4.408,191.75 -4.075,192.083 -3.742,192.083 -4.075,192.417 -3.742,192.75 -4.075,192.75 -4.408,193.083 -4.742,192.75 -5.075,192.75 -4.742,192.417 -5.075,192.083 ; -5.075,194.75 -4.408,195.083 -3.742,194.75 -4.075,195.417 -3.742,196.083 -4.408,195.75 -5.075,196.083 -4.742,195.417 -5.075,194.75 ; -5.075,197.75 -3.742,197.75 -3.742,199.083 -5.075,199.083 -5.075,197.75
  lines w0.5: -6.255,187.85 260.149,187.85 ; -6.255,199.85 260.149,199.85 ; 4.602,184.85 4.602,202.85 ; 16.099,184.85 16.099,202.85 ; 38.993,184.85 38.993,202.85 ; 48.95,184.85 48.95,202.85 ; 63.466,184.85 63.466,202.85 ; 93.357,184.85 93.357,202.85 ; 104.994,184.85 104.994,202.85 ; 119.75,184.85 119.75,202.85 ; 132.587,184.85 132.587,202.85 ; 162.078,184.85 162.078,202.85 ; 188.59,184.85 188.59,202.85 ; 215.102,184.85 215.102,202.85 ; 232.257,184.85 232.257,202.85 ; -6.255,184.85 260.149,184.85 260.149,202.85 -6.255,202.85 -6.255,184.85
  text "Symbol" at -4.455,200.75 h1.44
  text "Count" at 5.502,200.75 h1.44
  text "Hole Size" at 16.999,200.75 h1.44
  text "Plated" at 39.893,200.75 h1.44
  text "Hole Type" at 49.85,200.75 h1.44
  text "Drill Layer Pair" at 64.366,200.75 h1.44
  text "Via/Pad" at 94.257,200.75 h1.44
  text "Pad Shape" at 105.894,200.75 h1.44
  text "Template" at 120.65,200.75 h1.44
  text "Description" at 133.487,200.75 h1.44
  text "Hole Tolerance (+)" at 162.978,200.75 h1.44
  text "Hole Tolerance (-)" at 189.49,200.75 h1.44
  text "Hole Length" at 216.002,200.75 h1.44
  text "Routed Path Length" at 233.157,200.75 h1.44
  text "4" at 5.502,197.75 h1.2
  text "133.86mil (3.400mm)" at 16.999,197.75 h1.2
  text "NPTH" at 39.893,197.75 h1.2
  text "Round" at 49.85,197.75 h1.2
  text "Top Layer - Bottom Layer" at 64.366,197.75 h1.2
  text "Pad" at 94.257,197.75 h1.2
  text "Rounded" at 105.894,197.75 h1.2
  text "c0hn340" at 120.65,197.75 h1.2
  text "-" at 216.002,197.75 h1.2
  text "-" at 233.157,197.75 h1.2
  text "12" at 5.502,194.75 h1.2
  text "11.81mil (0.300mm)" at 16.999,194.75 h1.2
  text "PTH" at 39.893,194.75 h1.2
  text "Round" at 49.85,194.75 h1.2
  text "Top Layer - Bottom Layer" at 64.366,194.75 h1.2
  text "Via" at 94.257,194.75 h1.2
  text "Rounded" at 105.894,194.75 h1.2
  text "v60h30" at 120.65,194.75 h1.2
  text "Signal via 0.3 mm, 0.6mm" at 133.487,194.75 h1.2
  text "-" at 216.002,194.75 h1.2
  text "-" at 233.157,194.75 h1.2
  text "25" at 5.502,191.75 h1.2
  text "39.37mil (1.000mm)" at 16.999,191.75 h1.2
  text "PTH" at 39.893,191.75 h1.2
  text "Round" at 49.85,191.75 h1.2
  text "Top Layer - Bottom Layer" at 64.366,191.75 h1.2
  text "Pad" at 94.257,191.75 h1.2
  text "(Mixed)" at 105.894,191.75 h1.2
  text "(Mixed)" at 120.65,191.75 h1.2
  text "-" at 216.002,191.75 h1.2
  text "-" at 233.157,191.75 h1.2
  text "73" at 5.502,188.75 h1.2
  text "15.75mil (0.400mm)" at 16.999,188.75 h1.2
  text "PTH" at 39.893,188.75 h1.2
  text "Round" at 49.85,188.75 h1.2
  text "Top Layer - Bottom Layer" at 64.366,188.75 h1.2
  text "Via" at 94.257,188.75 h1.2
  text "Rounded" at 105.894,188.75 h1.2
  text "(Mixed)" at 120.65,188.75 h1.2
  text "(Mixed)" at 133.487,188.75 h1.2
  text "-" at 216.002,188.75 h1.2
  text "-" at 233.157,188.75 h1.2
  text "114 Total" at 5.502,185.75 h1.2